# EAGLE board 00A-005 Fuse Post Board (EAGLE 6.3)
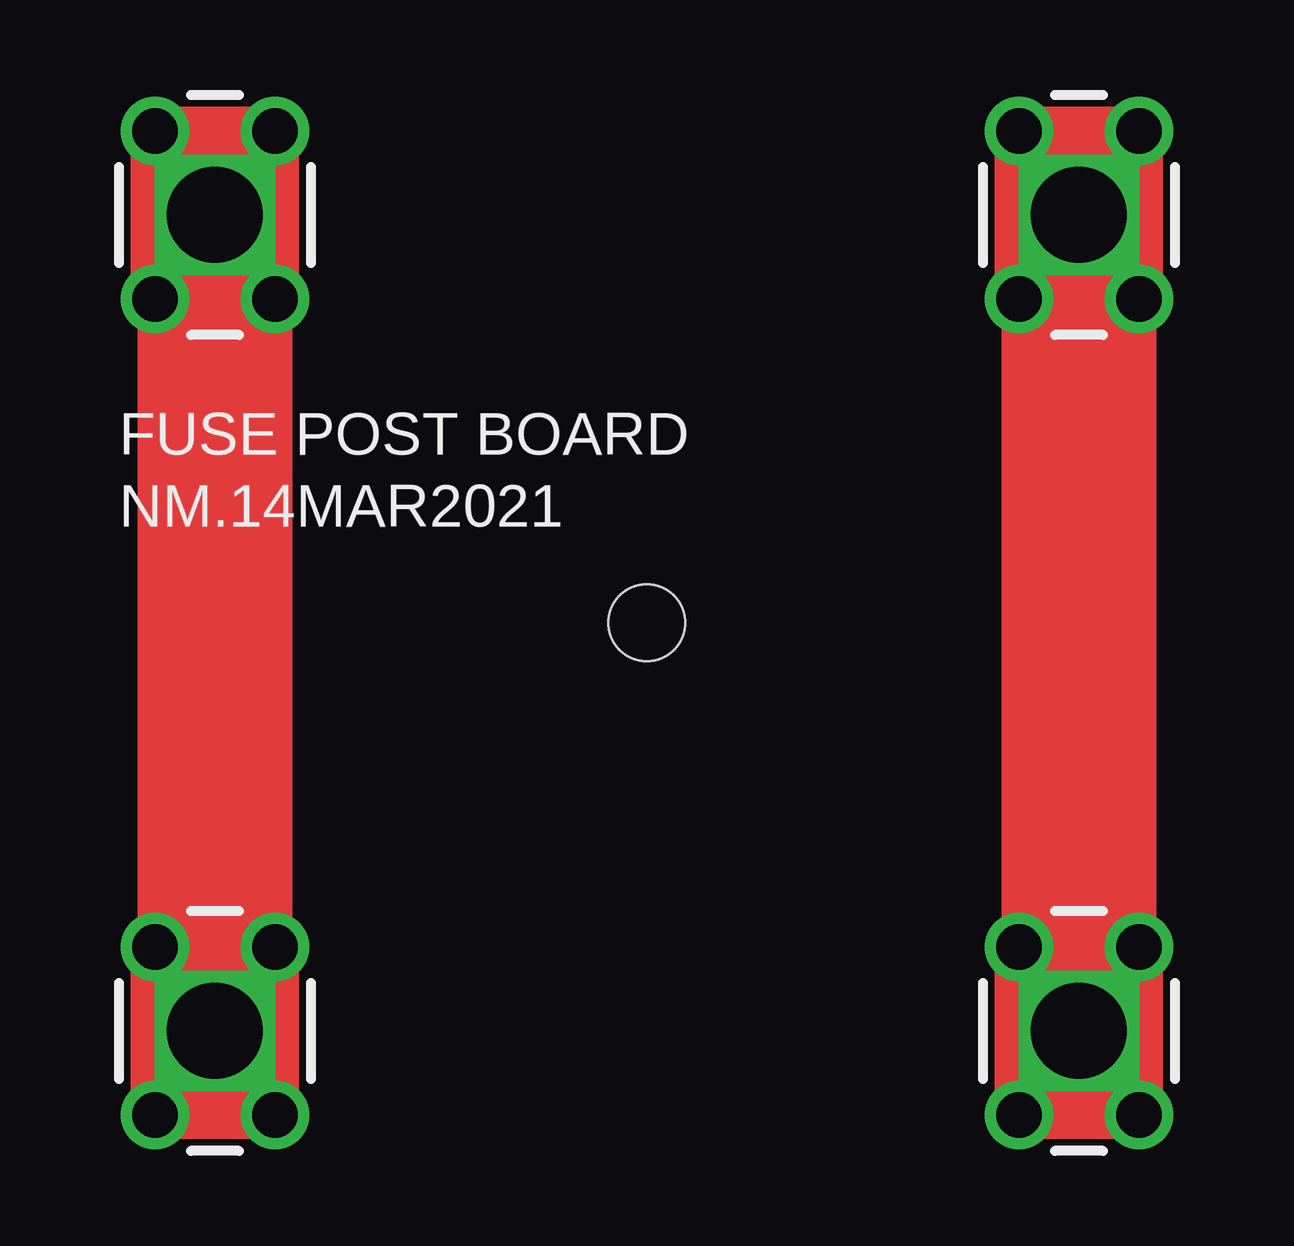
[diagram p0: board, top side]
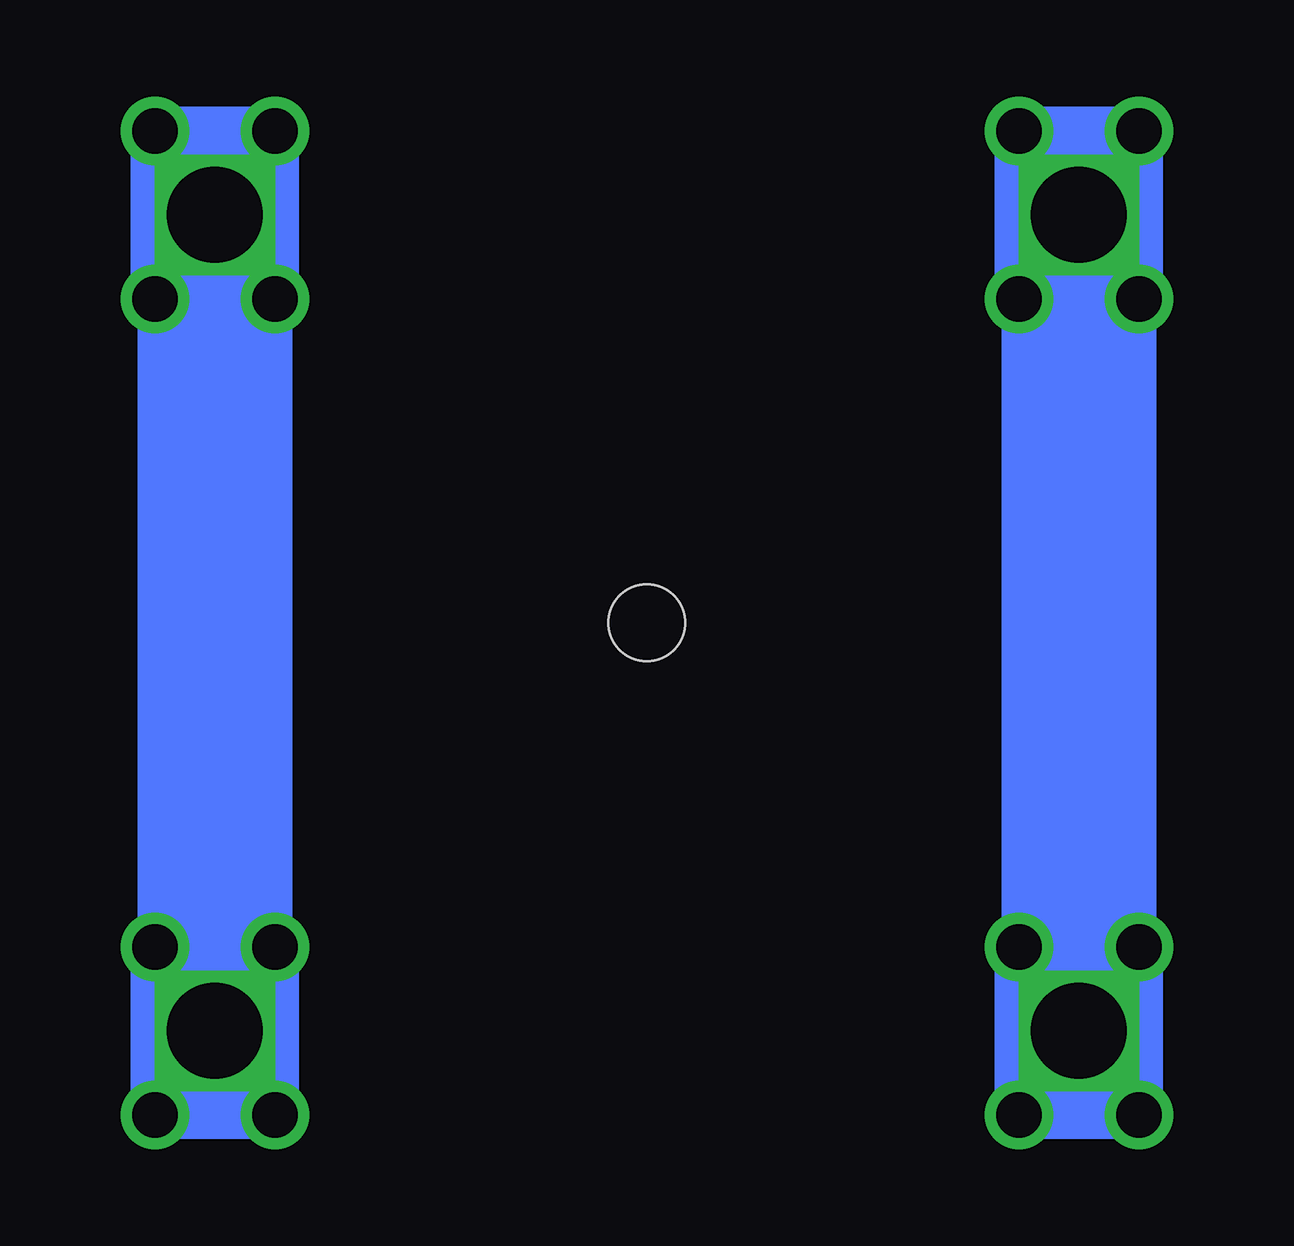
[diagram p1: board, bottom side, seen from below]

No outline drawn. Coordinates in mm, seen from the top.
Copper layers (1*16): Top 0.035mm / dielectric 1.5mm / Bottom 0.035mm
Design rules "default": minimum track width 10mil, minimum drill 24mil, track to track 8mil, track to pad 8mil, pad to pad 8mil, via to via 8mil, smd to smd 8mil, copper to edge 40mil, drill to drill 8mil, minimum pad ring 10mil, minimum via ring 8mil, stop-mask expansion 4mil, vias tented up to drill 0mil, thermal gap 10mil
Holes 3.2 mm at 25,25

## Footprints (pad centres in the part's own frame; a part is rotated, then mirrored left to right if it is on the bottom)
SCREW_TERMINAL_M4 = drill 1.9: P$1 -2.5,3.5; P$2 2.5,3.5; P$3 -2.5,-3.5; P$4 2.5,-3.5 | drill 4 square: P$5 0,0

## Placement (x,y rotation side)
U$1  TESTPOINT2M4  [SCREW_TERMINAL_M4]  43,8 0 top
U$2  TESTPOINT2M4  [SCREW_TERMINAL_M4]  7,8 0 top
U$3  TESTPOINT2M4  [SCREW_TERMINAL_M4]  43,42 0 top
U$4  TESTPOINT2M4  [SCREW_TERMINAL_M4]  7,42 0 top

## Library data of the parts
U$1-U$4 = nolan

## Nets
N$1: U$1.P$5 U$3.P$5
N$2: U$2.P$5 U$4.P$5

## Tracks (layer width: path | path; a pad name or v marks a point on that pad's centre or on a via)
N$1
  Top 6.452: U$3.P$5 U$1.P$5
  Bottom 6.452: U$3.P$5 U$1.P$5
N$2
  Top 6.452: U$4.P$5 U$2.P$5
  Bottom 6.452: U$4.P$5 U$2.P$5

## Text on the board
tPlace: FUSE POST BOARD | NM.14MAR2021